# Altium PCB PCBGuiding.PcbDoc
Units mm, origin at the board's own origin, x right, y up, seen from the top; angles counter-clockwise.
Board outline 80 x 65 mm, 2 copper layers (Top Layer, Bottom Layer); 33 components, 50 nets, 218 pads, 295 vias.
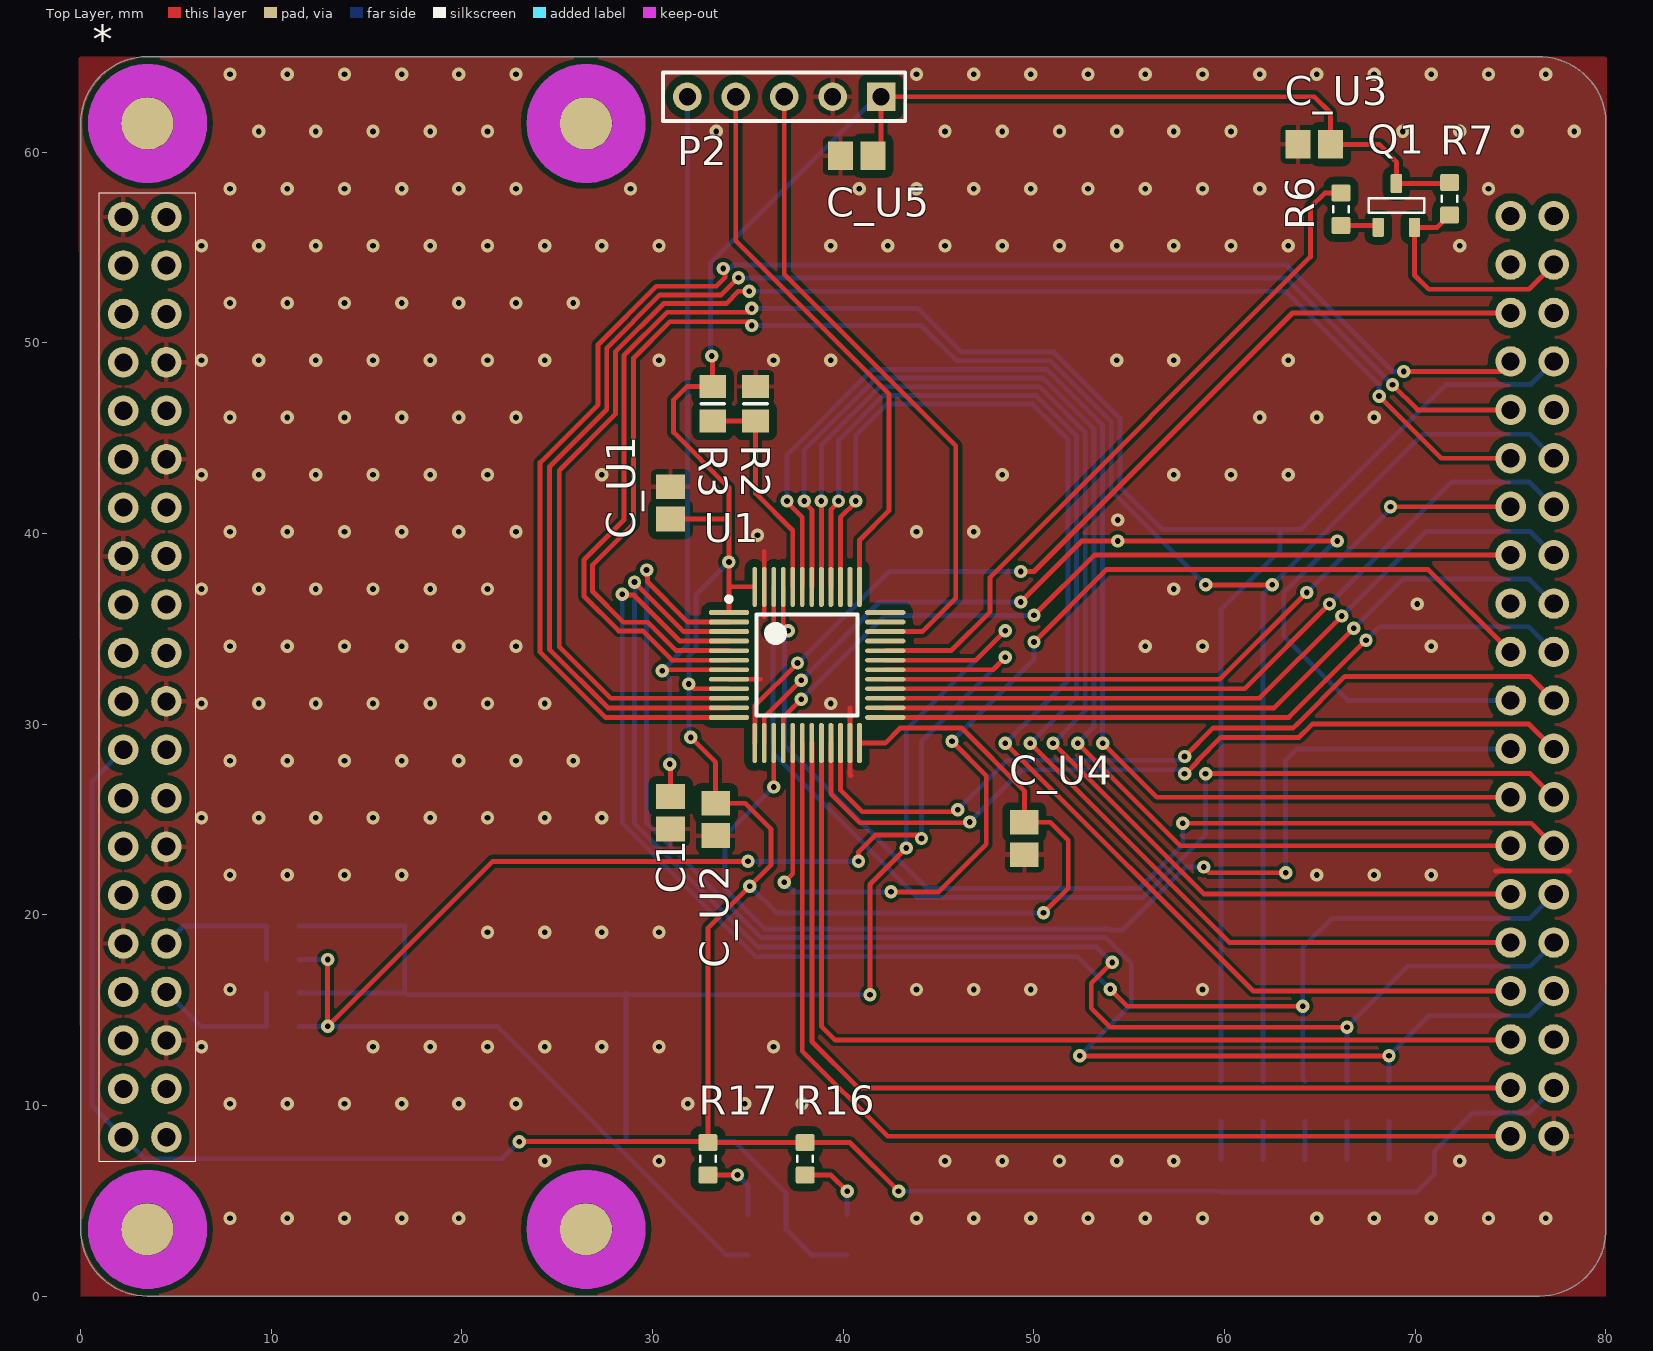
[diagram p0: Top Layer view]
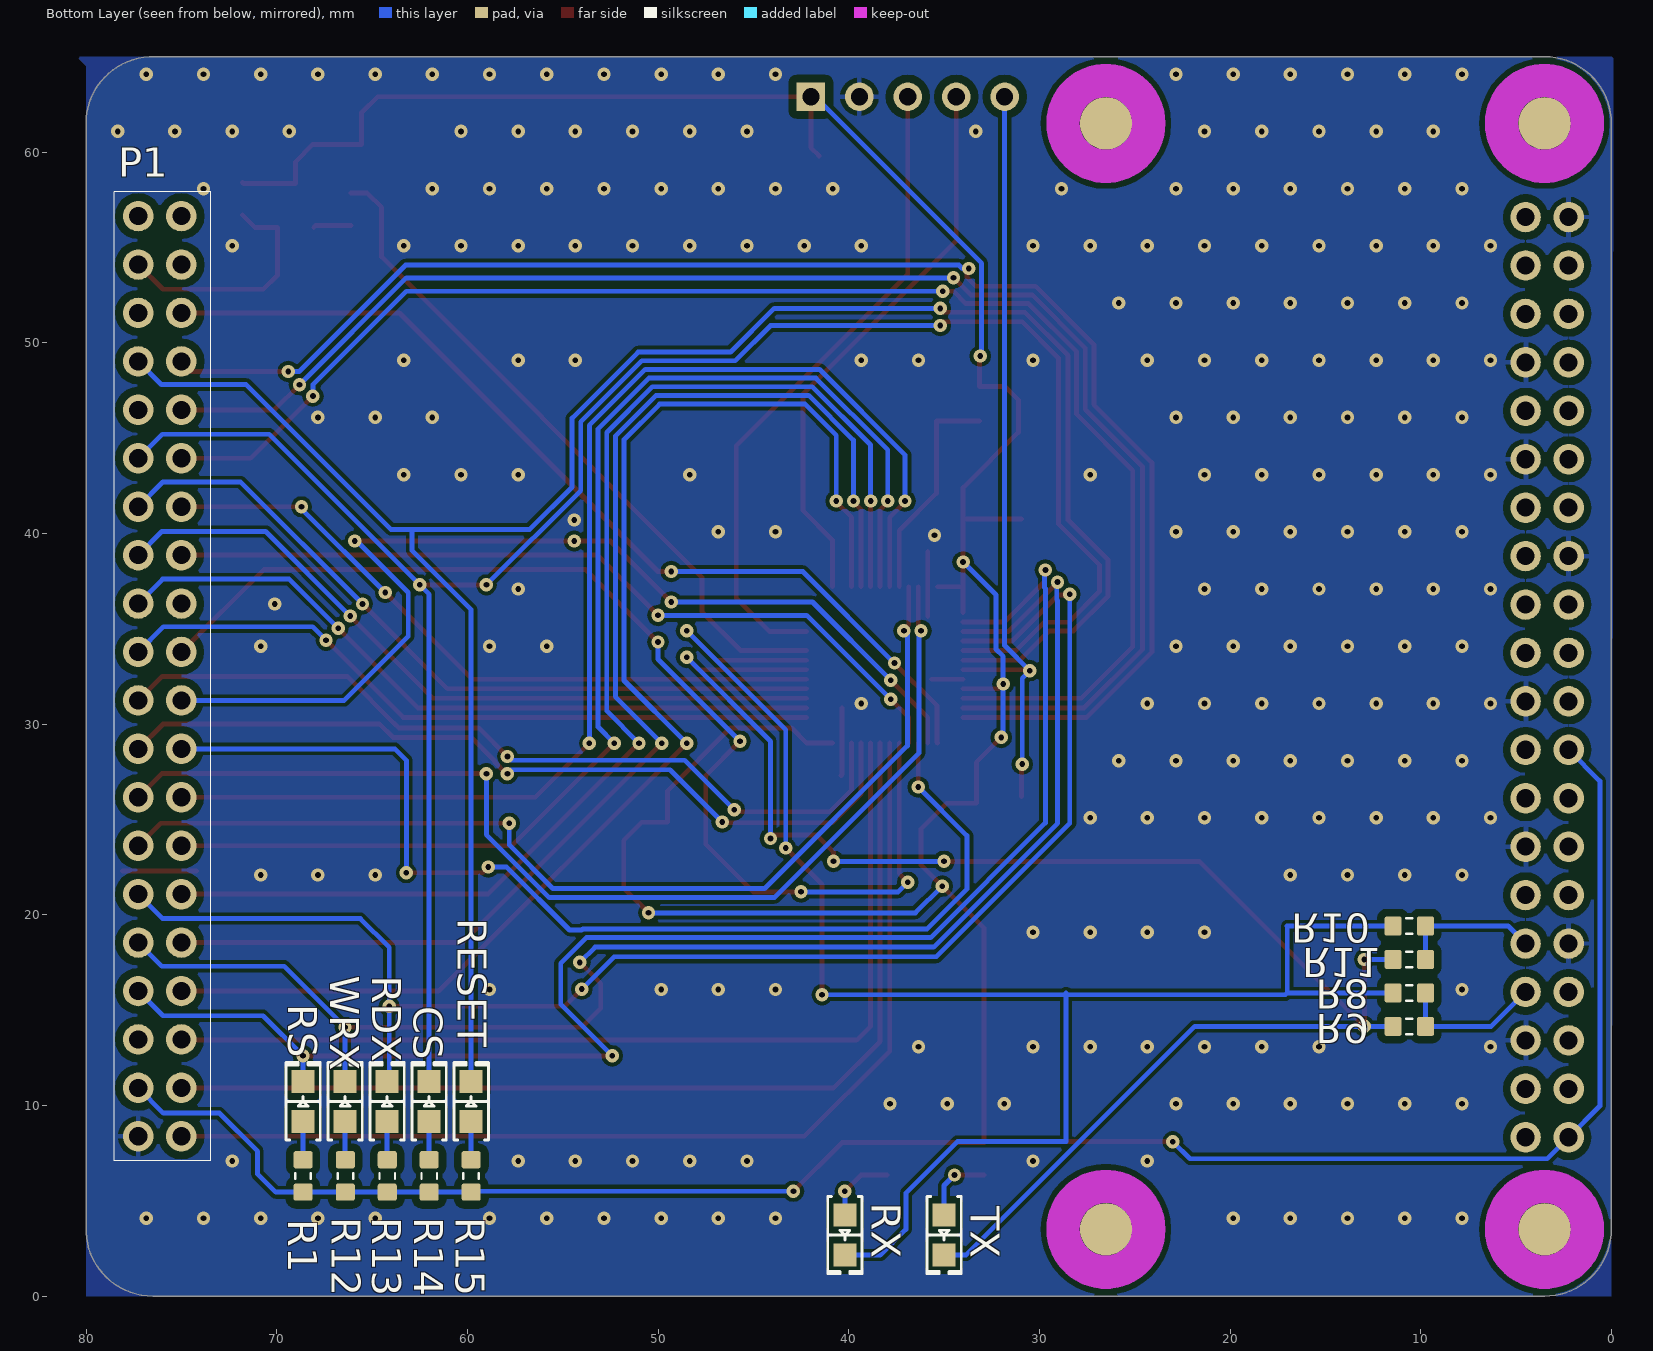
[diagram p1: Bottom Layer view, seen from below]
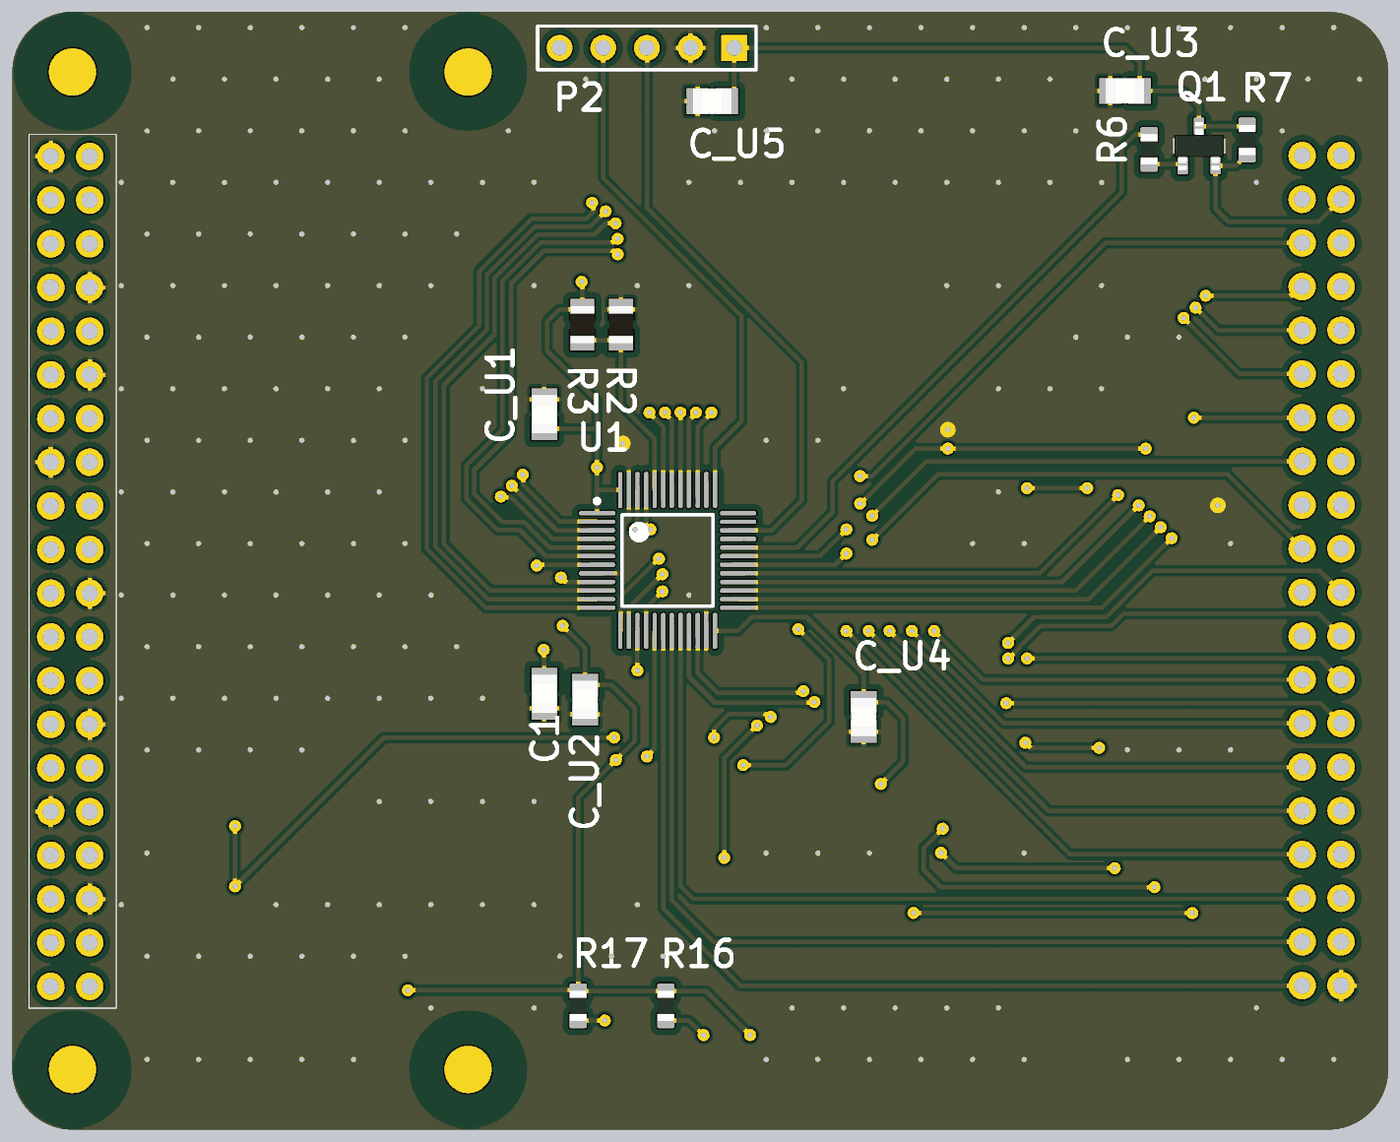
[diagram p2: 3D render of the assembled board from above, using the file's embedded part models]
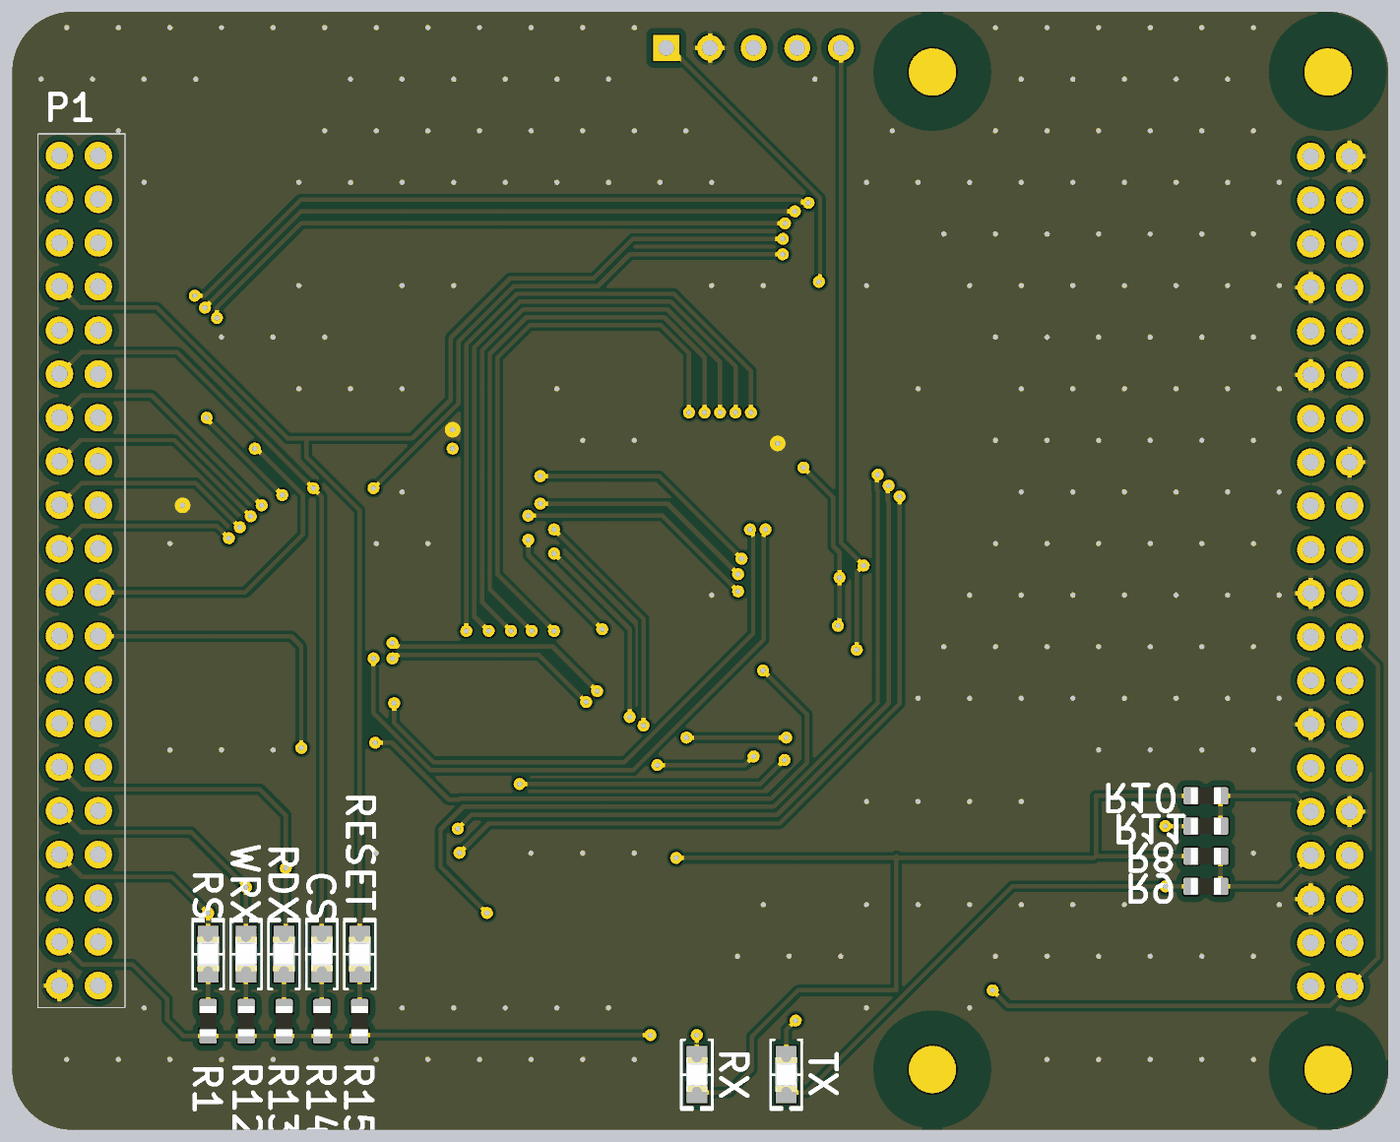
[diagram p3: 3D render of the assembled board from below, using the file's embedded part models]

## Layer stack, top to bottom
Top Solder: solder mask 0.0102, Solder Resist, Dk 3.5
Top Layer: signal copper 0.0356
Dielectric 1: dielectric 0.32, FR-4, Dk 4.8
Bottom Layer: signal copper 0.0356
Bottom Solder: solder mask 0.0102, Solder Resist, Dk 3.5

## Board outline
0,3.5 0,61.5 cw(c3.5,61.5) 3.5,65 76.373,65 76.373,64.998 cw(c76.5,61.5) 80,61.5 80,3.627 cw(c76.5,3.5) 76.5,-0.002 76.5,0 3.5,0 3.513,0 cw(c3.5,3.5)

## Design rules (kind name [scope] priority, off if disabled: settings)
AssemblyTestpoint [(IsVia)] p1: testpointundercomponent=FALSE minsize=1.016 maxsize=2.54 preferedsize=1.524 minholesize=0 maxholesize=0.7 preferedholesize=0.3 testpointgrid=0.025 usegrid=FALSE gridtolerance=0 allowsidetop=TRUE allowsidebottom=TRUE
Clearance Clearance_Keepout [All vs isKeepout] p1: gap=0.3 ignorepadtopadclearanceinfootprint=FALSE except(0: Arc-Hole Track-Hole SMDPad-Hole THPad-Hole Via-Hole Fill-Hole Poly-Hole Region-Hole Text-Hole)
Clearance Clearance_Poly_Pad [isPad vs inPoly] p2: gap=0.4 ignorepadtopadclearanceinfootprint=FALSE except(0: Arc-Hole Track-Hole SMDPad-Hole THPad-Hole Via-Hole Fill-Hole Poly-Hole Region-Hole Text-Hole)
Clearance [All] p3: gap=0.2 ignorepadtopadclearanceinfootprint=FALSE except(0: Arc-Hole Track-Hole SMDPad-Hole THPad-Hole Via-Hole Fill-Hole Poly-Hole Region-Hole Text-Hole)
HoleSize [All] p1: absolutevalues=TRUE maxlimit=2.54 minlimit=0.3 maxpercent=80.000 minpercent=20.000
MinimumAnnularRing [All] p1: minimumring=0.1
MinimumSolderMaskSliver [All] p1: minsoldermaskwidth=0.1
PolygonConnect PolygonConnect_Poly [isVia] p1: connectstyle=Direct reliefconductorwidth=0.254 reliefentries=4 polygonreliefangle="90 Angle" airgapwidth=0.254
PolygonConnect [All] p2: connectstyle=Relief reliefconductorwidth=0.254 reliefentries=4 polygonreliefangle="90 Angle" airgapwidth=0.254
RoomDefinition SchaltplanGuideing [InComponentClass('SchaltplanGuideing')] p1 off: confinementstyle=ConfineIn formatcopy=TRUE lockcomponents=FALSE outline 107.78,-11.867 141.943,-11.867 141.943,-7.549 107.78,-7.549
RoutingVias [All] p1: holewidth=0.3 width=0.7 viastyle="Through Hole" minholewidth=0.3 minwidth=0.7 maxholewidth=0.7 maxwidth=10
SilkToSolderMaskClearance [IsPad] p1: minsilkscreentomaskgap=0.15 clearancetoexposedcopper=TRUE
SolderMaskExpansion [All] p1: expansion=0.102
Width [All] p1: maxlimit=100 minlimit=0.18 preferedwidth=0.2 checkconnectedcopper=TRUE
26 further rules are at their usual default settings.

## Components (designator, comment, footprint, x,y, rotation, side; value= is the part's Value field where it differs from the comment)
* "RaspiZero" PIZero 2.24,8.33 r90 top locked
C1 "approved sub OK" CAPC2012N_0805 30.939,25.35 r90 top value=100n
C_U1 "approved sub OK" CAPC2012N_0805 30.939,41.6 r90 top value=4u7
C_U2 "approved sub OK" CAPC2012N_0805 33.3,25 r270 top value=100n
C_U3 "approved sub OK" CAPC2012N_0805 64.7,60.4 r180 top value=100n
C_U4 "approved sub OK" CAPC2012N_0805 49.5,24 r270 top value=1u
C_U5 "approved sub OK" CAPC2012N_0805 40.7,59.8 r180 top value=10n
CS "" LED_0805 62.004,10.211 r90 bottom
P1 "LCD_Interface" 40Pol 76.13,32.51 r90 bottom
P2 "Header 5" HDR1X5 41.98,62.9 r180 top
Q1 "BC846" SOT23-3 69.008,57.2 r90 top
R1 "Thick Film" 0608_RES 68.617,6.3 r90 bottom value=680R
R2 "" RESC2012N_0805 35.4,46.8 r270 top value=510
R3 "" RESC2012N_0805 33.146,46.8 r270 top value=nc
R6 "Thick Film" 0608_RES 66.1,57 r90 top value=680R
R7 "Thick Film" 0608_RES 71.8,57.55 r270 top value=680R
R8 "Thick Film" 0608_RES 10.6,15.9 r180 bottom value=680R
R9 "Thick Film" 0608_RES 10.6,14.146 r180 bottom value=680R
R10 "Thick Film" 0608_RES 10.6,19.409 r180 bottom value=680R
R11 "Thick Film" 0608_RES 10.6,17.654 r180 bottom value=680R
R12 "Thick Film" 0608_RES 66.4,6.3 r90 bottom value=680R
R13 "Thick Film" 0608_RES 64.2,6.3 r90 bottom value=680R
R14 "Thick Film" 0608_RES 62,6.3 r90 bottom value=680R
R15 "Thick Film" 0608_RES 59.8,6.3 r90 bottom value=680R
R16 "Thick Film" 0608_RES 38,7.2 r270 top value=680R
R17 "Thick Film" 0608_RES 32.9,7.2 r270 top value=680R
RDX "" LED_0805 64.209,10.211 r90 bottom
RESET "" LED_0805 59.8,10.211 r90 bottom
RS "" LED_0805 68.617,10.211 r90 bottom
RX "" LED_0805 40.2,3.2 r270 bottom
TX "" LED_0805 35,3.2 r270 bottom
U1 "STM32F030C8T6" LQFP48_M 38.1,33.1 r0 top
WRX "" LED_0805 66.413,10.211 r90 bottom

## Footprints (in the part's own frame and the unit in brackets; to place one, negate y for a bottom-side part, rotate by r counter-clockwise, add the part's x,y. Pads: shape width x height; smd on the part's side, far side on the other; paste and mask are expansions set on the pad)
40Pol [mm]
  round 1.6 hole 0.95: 1(-24.13,1.13) 1(-24.13,1.13) 2(-24.13,-1.13) 2(-24.13,-1.13) 3(-21.59,1.13) 4(-21.59,-1.13) 5(-19.05,1.13) 6(-19.05,-1.13) 7(-16.51,1.13) 8(-16.51,-1.13) 9(-13.97,1.13) 10(-13.97,-1.13) 11(-11.43,1.13) 12(-11.43,-1.13) 13(-8.89,1.13) 14(-8.89,-1.13) 15(-6.35,1.13) 16(-6.35,-1.13) 17(-3.81,1.13) 18(-3.81,-1.13) 19(-1.27,1.13) 20(-1.27,-1.13) 21(1.27,1.13) 22(1.27,-1.13) 23(3.81,1.13) 24(3.81,-1.13) 25(6.35,1.13) 26(6.35,-1.13) 27(8.89,1.13) 28(8.89,-1.13) 29(11.43,1.13) 30(11.43,-1.13) 31(13.97,1.13) 32(13.97,-1.13) 33(16.51,1.13) 34(16.51,-1.13) 35(19.05,1.13) 36(19.05,-1.13) 37(21.59,1.13) 38(21.59,-1.13) 39(24.13,1.13) 40(24.13,-1.13)
  silkscreen extent -25.4,-2.68 25.4,2.4
0608_RES [mm] "Chip Resistor, Body 1.6x0.8mm, 0603, IPC Medium Density"
  round 0.254 on Mech15: 0(0,0)
  rrect25% 0.9x1 smd: 1(-0.85,0) 2(0.85,0)
  Top Layer pour cut-out: -0.6,0.5 -0.4,0.7 0.4,0.7 0.6,0.5 0.6,-0.5 0.4,-0.7 -0.4,-0.7 -0.6,-0.5
  silkscreen extent -0.15,-0.41 0.15,0.41, body extent -0.87,-0.47 0.88,0.48, height 0.54
CAPC2012N_0805 [mm]
  rect 1.3x1.5 smd: 1(-0.85,0) 2(0.85,0)
  body extent -1.1,-0.72 1.11,0.73, height 0.75
HDR1X5 [mm] "Connector; Header; 5 Position"
  rect 1.5x1.5 hole 0.9: 1(0,0)
  round 1.5 hole 0.9: 2(2.54,0) 3(5.08,0) 4(7.62,0) 5(10.16,0)
  silkscreen extent -1.27,-1.27 11.43,1.27
LED_0805 [mm]
  rect 1.2x1.2 smd: 1(-1.05,0) 2(1.05,0)
  silkscreen extent -2.03,-0.9 2.03,0.9, body extent -1,-0.63 1,0.63, height 0.9
LQFP48_M [mm] "QFP, 48-Leads, Body 7x7mm, Pitch 0.5mm, IPC Low Density"
  oct 2.1x0.25 smd: 1(-4.1,2.75) 2(-4.1,2.25) 3(-4.1,1.75) 4(-4.1,1.25) 5(-4.1,0.75) 6(-4.1,0.25) 7(-4.1,-0.25) 8(-4.1,-0.75) 9(-4.1,-1.25) 10(-4.1,-1.75) 11(-4.1,-2.25) 12(-4.1,-2.75) 25(4.1,-2.75) 26(4.1,-2.25) 27(4.1,-1.75) 28(4.1,-1.25) 29(4.1,-0.75) 30(4.1,-0.25) 31(4.1,0.25) 32(4.1,0.75) 33(4.1,1.25) 34(4.1,1.75) 35(4.1,2.25) 36(4.1,2.75)
  oct 0.25x2.1 smd: 13(-2.75,-4.1) 14(-2.25,-4.1) 15(-1.75,-4.1) 16(-1.25,-4.1) 17(-0.75,-4.1) 18(-0.25,-4.1) 19(0.25,-4.1) 20(0.75,-4.1) 21(1.25,-4.1) 22(1.75,-4.1) 23(2.25,-4.1) 24(2.75,-4.1) 37(2.75,4.1) 38(2.25,4.1) 39(1.75,4.1) 40(1.25,4.1) 41(0.75,4.1) 42(0.25,4.1) 43(-0.25,4.1) 44(-0.75,4.1) 45(-1.25,4.1) 46(-1.75,4.1) 47(-2.25,4.1) 48(-2.75,4.1)
  silkscreen extent -4.22,-2.65 2.65,3.57, body extent -3.5,-3.5 3.5,3.5, height 1.6
PIZero [mm]
  round 1.6 hole 0.95: 1(0,0) 1(0,0) 2(0,-2.26) 2(0,-2.26) 3(2.54,0) 4(2.54,-2.26) 5(5.08,0) 6(5.08,-2.26) 7(7.62,0) 8(7.62,-2.26) 9(10.16,0) 10(10.16,-2.26) 11(12.7,0) 12(12.7,-2.26) 13(15.24,0) 14(15.24,-2.26) 15(17.78,0) 16(17.78,-2.26) 17(20.32,0) 18(20.32,-2.26) 19(22.86,0) 20(22.86,-2.26) 21(25.4,0) 22(25.4,-2.26) 23(27.94,0) 24(27.94,-2.26) 25(30.48,0) 26(30.48,-2.26) 27(33.02,0) 28(33.02,-2.26) 29(35.56,0) 30(35.56,-2.26) 31(38.1,0) 32(38.1,-2.26) 33(40.64,0) 34(40.64,-2.26) 35(43.18,0) 36(43.18,-2.26) 37(45.72,0) 38(45.72,-2.26) 39(48.26,0) 40(48.26,-2.26)
  round 2.5 all layers, no hole: ""(-4.826,-1.27) ""(-4.826,-24.27) ""(53.174,-24.27) ""(53.174,-1.27)
  Keep-Out Layer circle w1.75: c-4.826,-24.27 r2.25
  Keep-Out Layer circle w1.75: c-4.826,-1.27 r2.25
  Keep-Out Layer circle w1.75: c53.174,-1.27 r2.25
  Keep-Out Layer circle w1.75: c53.174,-24.27 r2.25
  silkscreen extent -1.27,-3.81 49.53,1.27
RESC2012N_0805 [mm]
  rect 1.2x1.4 smd: 1(-0.9,0) 2(0.9,0)
  silkscreen extent 0,-0.6 0,0.6, body extent -1.07,-0.7 1.07,0.7, height 0.65
SOT23-3 [mm] "SOT23, 3 pin"
  round 0.5 on Mech15: 0(0,0)
  rrect25% 1x0.6 smd: 1(-1.15,0.95) 2(-1.15,-0.95) 3(1.15,0)
  silkscreen extent -0.38,-1.45 0.38,1.45, body extent -1.4,-1.45 1.4,1.45

## Part data
C1 C_U3 C_U4: library part CAPC_1u_0603_X7R_16V_10%, "Capacitor SMD Cer 1uF 10% 16V X7R 0603", Manufacturer 1="TDK Corporation", Manufacturer Part Number 1=C1608X7R1C105K, Package / Case="0603 (1608 metric)", Ratings="16V; X7R", Supplier Part Number 1=445-1604-1-ND, Tolerance=±10%, ComponentLink1Description=http://product.tdk.com/capacitor/mlcc/en/documents/mlcc_commercial_general_en.pdf, ComponentLink1URL=http://product.tdk.com/capacitor/mlcc/en/documents/mlcc_commercial_general_en.pdf, Material=ceramic, SCDType=spec, Supplier 1=Digi-Key
C_U1: library part CAPC_1u_0603_X7R_16V_10%, "Capacitor SMD Cer 4,7uF 10% 16V X7R 0603", Manufacturer 1="TDK Corporation", Manufacturer Part Number 1=C1608X7R1C105K, Package / Case="0603 (1608 metric)", Ratings="16V; X7R", Supplier Part Number 1=445-1604-1-ND, Tolerance=±10%, ComponentLink1Description=http://product.tdk.com/capacitor/mlcc/en/documents/mlcc_commercial_general_en.pdf, ComponentLink1URL=http://product.tdk.com/capacitor/mlcc/en/documents/mlcc_commercial_general_en.pdf, Material=ceramic, SCDType=spec, Supplier 1=Digi-Key
C_U2: library part CAPC_1u_0603_X7R_16V_10%, "Capacitor SMD Cer 100nF 10% 16V X7R 0603", Manufacturer 1="TDK Corporation", Manufacturer Part Number 1=C1608X7R1C105K, Package / Case="0603 (1608 metric)", Ratings="16V; X7R", Supplier Part Number 1=445-1604-1-ND, Tolerance=±10%, ComponentLink1Description=http://product.tdk.com/capacitor/mlcc/en/documents/mlcc_commercial_general_en.pdf, ComponentLink1URL=http://product.tdk.com/capacitor/mlcc/en/documents/mlcc_commercial_general_en.pdf, Material=ceramic, SCDType=spec, Supplier 1=Digi-Key
C_U5: library part CAPC_1u_0603_X7R_16V_10%, "Capacitor SMD Cer 10nF 10% 16V X7R 0603", Manufacturer 1="TDK Corporation", Manufacturer Part Number 1=C1608X7R1C105K, Package / Case="0603 (1608 metric)", Ratings="16V; X7R", Supplier Part Number 1=445-1604-1-ND, Tolerance=±10%, ComponentLink1Description=http://product.tdk.com/capacitor/mlcc/en/documents/mlcc_commercial_general_en.pdf, ComponentLink1URL=http://product.tdk.com/capacitor/mlcc/en/documents/mlcc_commercial_general_en.pdf, Material=ceramic, SCDType=spec, Supplier 1=Digi-Key
CS RDX RESET RS RX TX WRX: library part LED_0805
P2: "Header, 5-Pin", LatestRevisionDate=17-Jul-2002, LatestRevisionNote="Re-released for DXP Platform.", Publisher="Altium Limited"
Q1: library part NPN_MMBT2222A, "Transistor SMD NPN 250mW SOT23-3"
R1 R6 R7 R8 R9 R10 R11 R12 R13 R14 R15 R16 R17: library part RES_0R_0603, "Resistor SMD chip 0.0 Ohm 0.1W 0603", Manufacturer 1=Vishay/Dale, Manufacturer 2="Panasonic Electronic Components", Manufacturer 3=Yageo, Manufacturer Part Number 1=CRCW06030000Z0EA, Manufacturer Part Number 2=ERJ-3GEY0R00V, Manufacturer Part Number 3=AC0603JR-070RL, Package / Case="0603 (1608metric)", Ratings=1/10W, Supplier Part Number 1=541-0.0GCT-ND, Tolerance=±5%, ComponentLink1Description=http://www.vishay.com/doc?20035, ComponentLink1URL=http://www.vishay.com/doc?20035, ComponentLink2Description=http://industrial.panasonic.com/www-cgi/jvcr13pz.cgi?E+PZ+3+AOA0001+ERJ3GEY0R00V+7+WW, ComponentLink2URL=http://industrial.panasonic.com/www-cgi/jvcr13pz.cgi?E+PZ+3+AOA0001+ERJ3GEY0R00V+7+WW, ComponentLink3Description=http://www.yageo.com/documents/recent/PYu-AC_51_RoHS_L_2.pdf, ComponentLink3URL=http://www.yageo.com/documents/recent/PYu-AC_51_RoHS_L_2.pdf, RoHS 2="RoHS Compliant", RoHS 3="RoHS Compliant", SCDType=spec, Supplier 1=Digi-Key, Supplier 2=Digi-Key, Supplier 3=Digi-Key, Supplier Part Number 2=P0.0GTR-ND, Supplier Part Number 3=311-0.0LECT-ND
R2 R3: library part Res2, "Resistor", LatestRevisionDate=17-Jul-2002, LatestRevisionNote="Re-released for DXP Platform.", PackageDescription="Axial Device, Thru-Hole; 2 Leads; 0.4 in Pin Spacing", PackageReference=AXIAL-0.4, Published=8-Jun-2000, Publisher="Altium Limited"
U1: "ARM Cortex-M0 32-bit MCU, 64 KB Flash, 8 KB Internal RAM, 39 I/Os, 48-pin LQFP, -40 to 85 degC, Tray", I/Os (High Current)=39, Operating Frequency(F) (Processor speed) (MHz)=48, Supply Voltage(Vcc) min (V)=2.4, ComponentLink1Description="Manufacturer URL", ComponentLink1URL=http://www.st.com/web/en/home.html, ComponentLink2Description=Datasheet, ComponentLink2URL=http://www.st.com/st-web-ui/static/active/en/resource/technical/document/datasheet/DM00088500.pdf, ComponentLink3Description="Package Specification", ComponentLink3URL=http://www.st.com/st-web-ui/static/active/en/resource/technical/document/datasheet/DM00058181.pdf, Core="ARM Cortex-M0", DatasheetVersion="Rev. 1", FLASH Size (Prog) (kB)=64, Internal RAM Size (kB)=8, Mounting Technology="Surface Mount", PackageDescription="48-Pin Low Profile Quad Flat Package, 7 x 7 mm Body, 0.5 mm Pitch", PackageReference=LQFP48, PackageVersion="Rev. 6, 06/2013", Packing=Tray, PartNumber=STM32F030C8T6

## Free pads (board coordinates)
  round 2.75 all layers, no hole: ""(3.5,3.5) ""(3.5,61.5) ""(26.5,3.5) ""(26.5,61.5)

## Via types
v1: diameter 0.7, hole 0.3, Top Layer to Bottom Layer, tented both sides, 213 vias
v2: diameter 0.7, hole 0.3, Top Layer to Bottom Layer, 82 vias

## Nets (pads, with @x,y where several pads share a name; then routed paths per layer and width w, separated by ;. In a path a pad name is that pad's centre, name@x,y a point inside that pad or via, vN(x,y) a via of type N, cw(c..) or ccw(c..) an arc to the next point about the centre after c; other vN are vias at no path point)
BOOT0: R2.2 R3.2 U1.44 | length 11.8
  Top Layer w0.254: R3.2 R2.2 35.4,42.1 37.35,40.15 U1.44
DB0: P1.2 U1.18 | length 55.2
  Top Layer w0.254: U1.18 37.85,12.85 42.32,8.38 P1.2@75,8.38
DB1: P1.4 U1.19 | length 53.3
  Top Layer w0.254: U1.19 38.35,13.35 40.78,10.92 P1.4
DB2: P1.6 U1.20 | length 51.3
  Top Layer w0.254: U1.20 38.85,14.15 39.577,13.423 74.963,13.423 P1.6
DB3: P1.8 U1.39 | length 70
  Top Layer w0.254: U1.39 39.85,40.843 40.65,41.643 v2(40.65,41.7) ; v2(48.5,29) 61.5,16 P1.8
  Bottom Layer w0.254: v2(40.65,41.7) 40.65,45.15 42.284,46.784 49.916,46.784 51.784,44.916 51.784,32.284 v2(48.5,29)
DB4: P1.10 U1.40 | length 68.8
  Top Layer w0.254: U1.40 39.35,41.243 39.75,41.643 v2(39.75,41.7) ; v2(49.8,29) 60.26,18.54 P1.10
  Bottom Layer w0.254: v2(39.75,41.7) 39.75,44.892 42.096,47.238 50.104,47.238 52.238,45.104 52.238,31.438 v2(49.8,29)
DB5: P1.12 U1.41 | length 67.8
  Top Layer w0.254: U1.41 v2(38.85,41.7) ; v2(51,29) 58.92,21.08 P1.12
  Bottom Layer w0.254: v2(38.85,41.7) 38.85,44.634 41.908,47.692 50.292,47.692 52.692,45.292 52.692,30.692 v2(51,29)
DB6: P1.14 U1.42 | length 67
  Top Layer w0.254: v2(37.95,41.7) 37.95,41.643 38.35,41.243 U1.42 ; v2(52.3,29) 57.68,23.62 P1.14
  Bottom Layer w0.254: v2(37.95,41.7) 37.95,44.376 41.72,48.146 50.48,48.146 53.146,45.48 53.146,29.846 v2(52.3,29)
DB7: P1.16 U1.43 | length 66.1
  Top Layer w0.254: v2(37.05,41.7) 37.05,41.643 37.85,40.843 U1.43 ; v2(53.6,29) 56.44,26.16 P1.16
  Bottom Layer w0.254: v2(37.05,41.7) 37.05,44.118 41.532,48.6 50.668,48.6 53.6,45.668 v2(53.6,29)
DB8: P1.13 U1.45 | length 54.5
  Top Layer w0.254: U1.45 36.85,35.213 37.105,34.957 v2(37.105,34.9) ; v2(57.8,24.8) 76.08,24.8 P1.13
  Bottom Layer w0.254: v2(37.105,34.9) 37.1,34.9 36.923,34.723 36.923,28.852 44.4,21.375 55.515,21.375 57.8,23.66 v2(57.8,24.8)
DB9: P1.15 U1.46 | length 58
  Top Layer w0.254: v2(36.205,34.9) 36.35,35.045 U1.46 ; v2(59,27.4) 76.02,27.4 P1.15
  Bottom Layer w0.254: v2(36.205,34.9) 36.211,34.9 36.311,34.8 36.311,28.489 43.9,20.9 55.7,20.9 59,24.2 v2(59,27.4)
DB10: P1.17 U1.21 | length 44.1
  Top Layer w0.254: U1.21 39.35,26.343 40.87,24.823 46.596,24.823 v2(46.636,24.864) ; v2(57.9,27.4) 57.957,27.4 58.577,28.02 58.577,28.077 59.8,29.3 63.9,29.3 64.6,30 75.96,30 P1.17
  Bottom Layer w0.254: v2(46.636,24.864) 49.373,27.6 57.7,27.6 v2(57.9,27.4)
DB11: P1.19 U1.22 | length 43.8
  Top Layer w0.254: U1.22 39.85,26.55 41,25.4 45.9,25.4 v2(46,25.5) ; v2(57.9,28.3) 59.4,29.8 63.6,29.8 63.8,30 66.3,32.5 76,32.5 P1.19
  Bottom Layer w0.254: v2(46,25.5) 48.6,28.1 57.7,28.1 v2(57.9,28.3)
DB12: P1.21 U1.25 | length 37.6
  Top Layer w0.254: U1.25 63.368,30.35 v2(67.409,34.391)
  Bottom Layer w0.254: v2(67.409,34.391) 68.118,35.1 75.94,35.1 P1.21
DB13: P1.23 U1.26 | length 38.4
  Top Layer w0.254: U1.26 62.596,30.85 v2(66.773,35.027)
  Bottom Layer w0.254: v2(66.773,35.027) 69.346,37.6 75.98,37.6 P1.23
DB14: P1.25 U1.27 | length 39.2
  Top Layer w0.254: U1.27 61.823,31.35 v2(66.136,35.664)
  Bottom Layer w0.254: v2(66.136,35.664) 70.573,40.1 76.02,40.1 P1.25
DB15: P1.27 U1.28 | length 40.1
  Top Layer w0.254: U1.28 61.05,31.85 v2(65.5,36.3)
  Bottom Layer w0.254: v2(65.5,36.3) 71.9,42.7 75.96,42.7 P1.27
GND: *.6 *.9 *.14 *.20 *.25 *.30 *.34 *.39 C1.1 C_U1.2 C_U2.2 C_U3.2 C_U4.2 C_U5.2 P1.1 P2.2 R2.1 U1.8 U1.23 U1.47 | length 12.5
  Top Layer w0.254: U1.8 35.65,32.35 ; 35.85,35.65 U1.47 35.85,39.05 ; 40.35,30.85 U1.23 40.35,27.35 40.4,27.3 ; 74.2,22.3 78.1,22.3
  other v1: 7.837,4.082 10.837,4.082 13.837,4.082 16.837,4.082 19.837,4.082 43.837,4.082 46.837,4.082 49.837,4.082 52.837,4.082 55.837,4.082 58.837,4.082 64.837,4.082 67.837,4.082 70.837,4.082 73.837,4.082 76.837,4.082 24.337,7.082 30.337,7.082 45.337,7.082 48.337,7.082 51.337,7.082 54.337,7.082 57.337,7.082 72.337,7.082 7.837,10.082 10.837,10.082 13.837,10.082 16.837,10.082 19.837,10.082 22.837,10.082 31.837,10.082 34.837,10.082 37.837,10.082 6.337,13.082 15.337,13.082 18.337,13.082 21.337,13.082 24.337,13.082 27.337,13.082 30.337,13.082 36.337,13.082 7.837,16.082 43.837,16.082 46.837,16.082 49.837,16.082 58.837,16.082 21.337,19.082 24.337,19.082 27.337,19.082 30.337,19.082 7.837,22.082 10.837,22.082 13.837,22.082 16.837,22.082 64.837,22.082 67.837,22.082 70.837,22.082 6.337,25.082 9.337,25.082 12.337,25.082 15.337,25.082 18.337,25.082 21.337,25.082 24.337,25.082 27.337,25.082 7.837,28.082 10.837,28.082 13.837,28.082 16.837,28.082 19.837,28.082 22.837,28.082 25.837,28.082 6.337,31.082 9.337,31.082 12.337,31.082 15.337,31.082 18.337,31.082 21.337,31.082 24.337,31.082 39.337,31.082 7.837,34.082 10.837,34.082 13.837,34.082 16.837,34.082 19.837,34.082 22.837,34.082 55.837,34.082 58.837,34.082 70.837,34.082 6.337,37.082 9.337,37.082 12.337,37.082 15.337,37.082 18.337,37.082 21.337,37.082 57.337,37.082 7.837,40.082 10.837,40.082 13.837,40.082 16.837,40.082 19.837,40.082 22.837,40.082 43.837,40.082 46.837,40.082 6.337,43.082 9.337,43.082 12.337,43.082 15.337,43.082 18.337,43.082 21.337,43.082 27.337,43.082 48.337,43.082 57.337,43.082 60.337,43.082 63.337,43.082 7.837,46.082 10.837,46.082 13.837,46.082 16.837,46.082 19.837,46.082 22.837,46.082 61.837,46.082 64.837,46.082 67.837,46.082 6.337,49.082 9.337,49.082 12.337,49.082 15.337,49.082 18.337,49.082 21.337,49.082 24.337,49.082 30.337,49.082 36.337,49.082 39.337,49.082 54.337,49.082 57.337,49.082 63.337,49.082 7.837,52.082 10.837,52.082 13.837,52.082 16.837,52.082 19.837,52.082 22.837,52.082 25.837,52.082 6.337,55.082 9.337,55.082 12.337,55.082 15.337,55.082 18.337,55.082 21.337,55.082 24.337,55.082 27.337,55.082 30.337,55.082 39.337,55.082 42.337,55.082 45.337,55.082 48.337,55.082 51.337,55.082 54.337,55.082 57.337,55.082 60.337,55.082 63.337,55.082 72.337,55.082 7.837,58.082 10.837,58.082 13.837,58.082 16.837,58.082 19.837,58.082 22.837,58.082 28.837,58.082 40.837,58.082 43.837,58.082 46.837,58.082 49.837,58.082 52.837,58.082 55.837,58.082 58.837,58.082 61.837,58.082 73.837,58.082 9.337,61.082 12.337,61.082 15.337,61.082 18.337,61.082 21.337,61.082 33.337,61.082 45.337,61.082 48.337,61.082 51.337,61.082 54.337,61.082 57.337,61.082 60.337,61.082 69.337,61.082 72.337,61.082 75.337,61.082 78.337,61.082 7.837,64.082 10.837,64.082 13.837,64.082 16.837,64.082 19.837,64.082 22.837,64.082 43.837,64.082 46.837,64.082 49.837,64.082 52.837,64.082 55.837,64.082 58.837,64.082 61.837,64.082 64.837,64.082 67.837,64.082 70.837,64.082 73.837,64.082 76.837,64.082
  other v2: 70.1,36.3 35.5,39.9 54.4,40.7
GPIO2: P1.28 U1.29 | length 36.6
  Top Layer w0.254: U1.29 59.75,32.35 v2(64.3,36.9) ; v2(68.7,41.4) P1.28
  Bottom Layer w0.254: v2(64.3,36.9) 68.7,41.3 v2(68.7,41.4)
GPIO3: P1.36 U1.13 | length 50.1
  Top Layer w0.254: U1.13 35.377,29.027 35.377,30.977 v2(37.6,33.2) ; v2(49.3,38) 50,38 63.56,51.56 P1.36
  Bottom Layer w0.254: v2(37.6,33.2) 42.4,38 v2(49.3,38)
GPIO6: P1.30 U1.10 | length 79
  Top Layer w0.254: U1.10 27.8,31.35 25.1,34.05 25.1,43.3 28.046,46.246 28.046,49.53 30.57,52.054 33.854,52.054 34.5,52.7 v2(35.073,52.7) ; v2(68.1,47.2) 71.36,43.94 P1.30
  Bottom Layer w0.254: v2(35.073,52.7) 63.2,52.7 68.1,47.8 v2(68.1,47.2)
GPIO7: P1.32 U1.11 | length 79.5
  Top Layer w0.254: U1.11 27.658,30.85 24.6,33.908 24.6,43.507 27.592,46.499 27.592,49.718 30.382,52.508 33.601,52.508 34.493,53.4 v2(34.5,53.4) ; v2(68.8,47.8) 70.12,46.48 P1.32
  Bottom Layer w0.254: v2(34.5,53.4) 63.207,53.4 68.8,47.807 v2(68.8,47.8)
GPIO8: P1.34 U1.12 | length 81.2
  Top Layer w0.254: v2(33.71,53.89) 33.793,53.807 33.793,53.407 33.348,52.962 30.194,52.962 27.138,49.906 27.138,46.752 24.1,43.714 24.1,33.766 27.516,30.35 U1.12 ; v2(69.39,48.49) 74.47,48.49 P1.34
  Bottom Layer w0.254: v2(33.71,53.89) 34.033,53.89 34.22,54.077 63.237,54.077 68.824,48.49 v2(69.39,48.49)
LCD_CS: CS.2 P1.29 U1.5 | length 108.5
  Top Layer w0.254: U1.5 31.229,33.85 29.739,35.34 28.467,35.34 26.854,36.954 26.854,38.354 29,40.5 29,49.2 30.9,51.1 35,51.1 v2(35.2,50.9) ; v2(59,37.3) v2(62.5,37.3)
  Bottom Layer w0.254: v2(35.2,50.9) 44.1,50.9 45.946,49.054 50.856,49.054 54.054,45.856 54.054,42.246 v2(59,37.3) ; CS.2@62.004,11.25 CS.2 62.004,36.804 70.4,45.2 76,45.2 P1.29
LCD_RESET: P1.33 RESET.2 U1.6 | length 113.1
  Top Layer w0.254: U1.6 31.022,33.35 29.486,34.886 28.214,34.886 26.4,36.7 26.4,38.607 28.5,40.707 28.5,49.342 30.758,51.6 35,51.6 v2(35.2,51.8)
  Bottom Layer w0.254: v2(35.2,51.8) 43.907,51.8 46.199,49.508 51.044,49.508 54.508,46.044 54.508,42.434 56.735,40.207 62.9,40.207 ; RESET.2 59.8,36 62.9,39.1 62.9,40.207 ; P1.33 76.04,47.8 71.6,47.8 64.007,40.207 62.9,40.207
Net*_8: *.8 R8.2 R9.2 | length 7.8
  Bottom Layer w0.254: *.8 6.304,14.146 R9.2 R8.2
Net*_10: *.10 R10.2 R11.2 | length 7.4
  Bottom Layer w0.254: *.10 5.419,19.409 R10.2 R11.2
NetCS_1: CS.1 R14.2 | length 2
  Bottom Layer w0.254: R14.2 62.004,7.154 CS.1
NetP1_37: P1.37 Q1.2 R7.2 | length 12.8
  Top Layer w0.254: R7.2 71.15,56.05 Q1.2 69.958,53.542 70.7,52.8 75.96,52.8 P1.37
NetQ1_1: Q1.1 R6.1 | length 2
  Top Layer w0.254: R6.1 67.958,56.15 Q1.1
NetR1_2: R1.2 RS.1 | length 2
  Bottom Layer w0.254: R1.2 RS.1
NetR12_2: R12.2 WRX.1 | length 2
  Bottom Layer w0.254: R12.2 66.413,7.163 WRX.1
NetR13_2: R13.2 RDX.1 | length 2
  Bottom Layer w0.254: R13.2 64.209,7.159 RDX.1
NetR15_2: R15.2 RESET.1 | length 2
  Bottom Layer w0.254: R15.2 RESET.1
NetR16_2: R16.2 RX.1 | length 3.8
  Top Layer w0.254: R16.2 39.35,6.35 v2(40.2,5.5)
  Bottom Layer w0.254: RX.1 v2(40.2,5.5)
NetR17_2: R17.2 TX.1 | length 3.9
  Top Layer w0.254: R17.2 v2(34.45,6.35)
  Bottom Layer w0.254: v2(34.45,6.35) 35,5.8 TX.1
PWM1: R6.2 U1.32 | length 36.4
  Top Layer w0.254: U1.32 45.65,33.85 47.7,35.9 47.7,37.7 64.5,54.5 64.5,57.1 65.25,57.85 R6.2
RDX: P1.11 RDX.2 U1.4 | length 79.7
  Top Layer w0.254: v2(28.41,36.81) 28.451,36.769 29.016,36.769 31.436,34.35 U1.4 ; v2(54,16.1) 54.9,15.2 v2(64.1,15.2)
  Bottom Layer w0.254: v2(28.41,36.81) 28.41,24.79 35.4,17.8 52.3,17.8 v2(54,16.1) ; RDX.2@64.209,11.25 RDX.2 64.1,11.37 v2(64.1,15.2) 64.1,18.291 65.609,19.8 75.98,19.8 P1.11
RESET: C1.2 P2.5 U1.7 | length 40.9
  Top Layer w0.254: v2(30.5,32.8) 30.55,32.85 U1.7 ; v2(30.9,27.9) 30.939,27.861 C1.2
  Bottom Layer w0.254: v2(30.9,27.9) 30.9,32.4 v2(30.5,32.8) 31.82,34.12 P2.5
RS: P1.7 RS.2 U1.2 | length 81.1
  Top Layer w0.254: v2(29.683,38.083) 29.683,37.767 29.723,37.727 29.723,37.477 31.85,35.35 U1.2 ; v2(52.4,12.6) v2(68.617,12.6)
  Bottom Layer w0.254: v2(29.683,38.083) 29.723,38.042 29.723,37.166 29.683,37.125 29.683,24.817 35.7,18.8 53.757,18.8 55.1,17.457 55.1,15.3 v2(52.4,12.6) ; RS.2@68.617,11.25 RS.2 v2(68.617,12.6) 70.717,14.7 75.96,14.7 P1.7
SPI_MISO: P1.26 U1.16 | length 43
  Top Layer w0.254: U1.16 36.85,30.35 v2(37.8,31.3) ; v2(50,35.7) 53.16,38.86 P1.26
  Bottom Layer w0.254: v2(37.8,31.3) 42.2,35.7 v2(50,35.7)
SPI_MOSI: P1.22 U1.17 | length 60.8
  Top Layer w0.254: v2(36.9,21.7) 37.35,22.15 U1.17 ; v2(42.5,21.2) 45,21.2 47.5,23.7 47.5,27.3 v2(45.7,29.1) ; v2(50,34.3) 53.8,38.1 70.68,38.1 P1.22
  Bottom Layer w0.254: v2(36.9,21.7) 37.4,21.2 v2(42.5,21.2) ; v2(45.7,29.1) 50,33.4 v2(50,34.3)
SPI_NSS: P1.20 U1.14 | length 54.8
  Top Layer w0.254: U1.14 35.85,30.35 v2(37.8,32.3) ; v2(49.3,36.4) 52.5,39.6 v2(54.4,39.6) 54.5,39.5 54.6,39.6 v2(65.9,39.6)
  Bottom Layer w0.254: v2(37.8,32.3) 41.9,36.4 v2(49.3,36.4) ; v2(65.9,39.6) 65.8,39.6 63.1,36.9 63.1,34.6 66.46,31.24 P1.20
SPI_SCL: P1.18 U1.15 | length 58.4
  Top Layer w0.254: v2(36.35,26.7) U1.15 ; v2(58.9,22.5) 59.2,22.2 v2(63.2,22.2)
  Bottom Layer w0.254: v2(36.35,26.7) 33.8,24.15 33.8,21.342 35.888,19.254 53.945,19.254 53.999,19.2 54.642,19.2 57.942,22.5 v2(58.9,22.5) ; v2(63.2,22.2) 63.2,28.1 63.8,28.7 P1.18
SWCLK: P2.4 U1.37 | length 29.7
  Top Layer w0.254: P2.4 34.36,55.34 42.404,47.296 42.404,41.204 40.85,39.65 U1.37
SWDIO: P2.3 U1.34 | length 34.5
  Top Layer w0.254: P2.3 36.9,53.6 45.9,44.6 45.9,36.6 44.15,34.85 U1.34
USART_RX: R8.1 R10.1 RX.2 U1.31 | length 91
  Top Layer w0.254: v2(41.4,15.8) 41.4,17.9 41.4,21.6 v2(43.3,23.5) ; U1.31 46.95,33.35 v2(48.5,34.9)
  Bottom Layer w0.254: R8.1 17,15.9 ; R10.1 17.009,19.409 17,19.4 17,15.9 ; 28.6,15.9 28.6,8.1 34.3,8.1 37,5.4 37,3.5 38.35,2.15 RX.2 ; v2(41.4,15.8) 17.1,15.8 17,15.9 ; v2(43.3,23.5) 43.3,29.7 v2(48.5,34.9)
USART_TX: R9.1 R11.1 TX.2 U1.30 | length 87.1
  Top Layer w0.254: v2(12.954,17.654) v2(12.954,14.146) 21.609,22.8 v2(35,22.8) ; v2(40.8,22.8) 40.8,23.3 41.677,24.177 43.923,24.177 v2(44.1,24) ; U1.30 47.85,32.85 v2(48.5,33.5)
  Bottom Layer w0.254: R9.1 v2(12.954,14.146) 21.854,14.146 33.85,2.15 TX.2 ; R11.1 v2(12.954,17.654) ; v2(35,22.8) v2(40.8,22.8) ; v2(44.1,24) 44.1,29.1 v2(48.5,33.5)
VDD: *.1 *.17 C_U1.1 C_U2.1 C_U3.1 C_U4.1 C_U5.1 P1.3 P2.1 Q1.3 R1.1 R3.1 R7.1 R12.1 R13.1 R14.1 R15.1 R16.1 R17.1 U1.1 U1.9 U1.24 U1.48 | length 249
  Top Layer w0.254: v2(23,8.1) 32.85,8.1 R17.1 ; C_U1.1 33.95,40.75 34,40.7 ; v2(31.9,32.1) 32.15,31.85 U1.9 ; v2(32,29.3) 33.3,28 C_U2.1 34.85,25.85 36.2,24.5 36.2,22.6 v2(35.1,21.5) 32.9,19.3 R17.1 ; v2(33.1,49.3) 33.146,49.254 R3.1 31.8,47.7 31.1,47 31.1,45.3 34,42.4 34,40.7 ; U1.1 34,37.2 ; U1.48 34,37.2 ; U1.24 42.2,29 43,29.8 46.2,29.8 49.5,26.5 C_U4.1 50.85,24.85 51.8,23.9 51.8,21.4 v2(50.5,20.1) ; C_U5.1 41.98,60.23 P2.1 64.7,62.9 65.55,62.05 C_U3.1 68.1,60.4 69.008,59.492 Q1.3 71.75,58.35 R7.1 ; v2(42.9,5.5) 40.35,8.05 R16.1 R17.1 ; 34,37.2 v2(34,38.5) 34,40.7
  Bottom Layer w0.254: *.17 0.6,27.01 0.6,9.97 2.24,8.33 3.37,7.2 22.1,7.2 v2(23,8.1) ; v2(32,29.3) 31.9,29.4 v2(31.9,32.1) 31.9,33.558 32.274,33.932 32.274,36.774 v2(34,38.5) ; v2(33.1,49.3) 33.033,49.367 33.033,54.17 41.763,62.9 P2.1 ; v2(35.1,21.5) 36.5,20.1 v2(50.5,20.1) ; v2(42.9,5.5) 59.75,5.5 R15.1 R14.1 R13.1 R12.1 R1.1 70.05,5.45 71,6.4 71,7.6 73,9.6 75.94,9.6 P1.3
WRX: P1.9 U1.3 WRX.2 | length 79
  Top Layer w0.254: v2(29.046,37.446) 31.643,34.85 U1.3 ; v2(54.1,17.5) 53,16.4 53,15.1 54,14.1 v2(66.413,14.1)
  Bottom Layer w0.254: v2(29.046,37.446) 29.087,37.406 29.087,36.53 29.046,36.489 29.046,24.796 35.542,18.3 53.3,18.3 v2(54.1,17.5) ; WRX.2@66.413,11.25 WRX.2 v2(66.413,14.1) 69.613,17.3 76.02,17.3 P1.9
pads on no net: *. *.2 *.3 *.4 *.5 *.7 *.11 *.12 *.13 *.15 *.16 *.18 *.19 *.21 *.22 *.23 *.24 *.26 *.27 *.28 *.29 *.31 *.32 *.33 *.35 *.36 *.37 *.38 *.40 P1.5 P1.24 P1.31 P1.35 P1.38 P1.39 P1.40 Q1.0 R1.0 R6.0 R7.0 R8.0 R9.0 R10.0 R11.0 R12.0 R13.0 R14.0 R15.0 R16.0 R17.0 U1.33 U1.35 U1.36 U1.38

## Polygon pours and split planes (outlines as drawn)
GND on Top Layer "Top Layer-No Net" (solid, pour order 0): -0.1,65 80.036,65 80,0 -0.001,0
GND on Bottom Layer "Top Layer-No Net" (solid, pour order 2): -0.1,65 80.5,65 80,64.5 80,0 -0.001,0

## Silkscreen, mask and mechanical layers (free items; w line width, h text height)
Mechanical 1:
  lines w0.05: 3.5,0 76.5,0 ; 3.513,0 cw(c3.5,3.5) 0,3.5 0,61.5 cw(c3.5,61.5) 3.5,65 76.373,65 ; 76.373,64.998 cw(c76.5,61.5) 80,61.5 80,3.627 cw(c76.5,3.5) 76.5,-0.002